# EAGLE board Prototype1 (EAGLE 6.1)
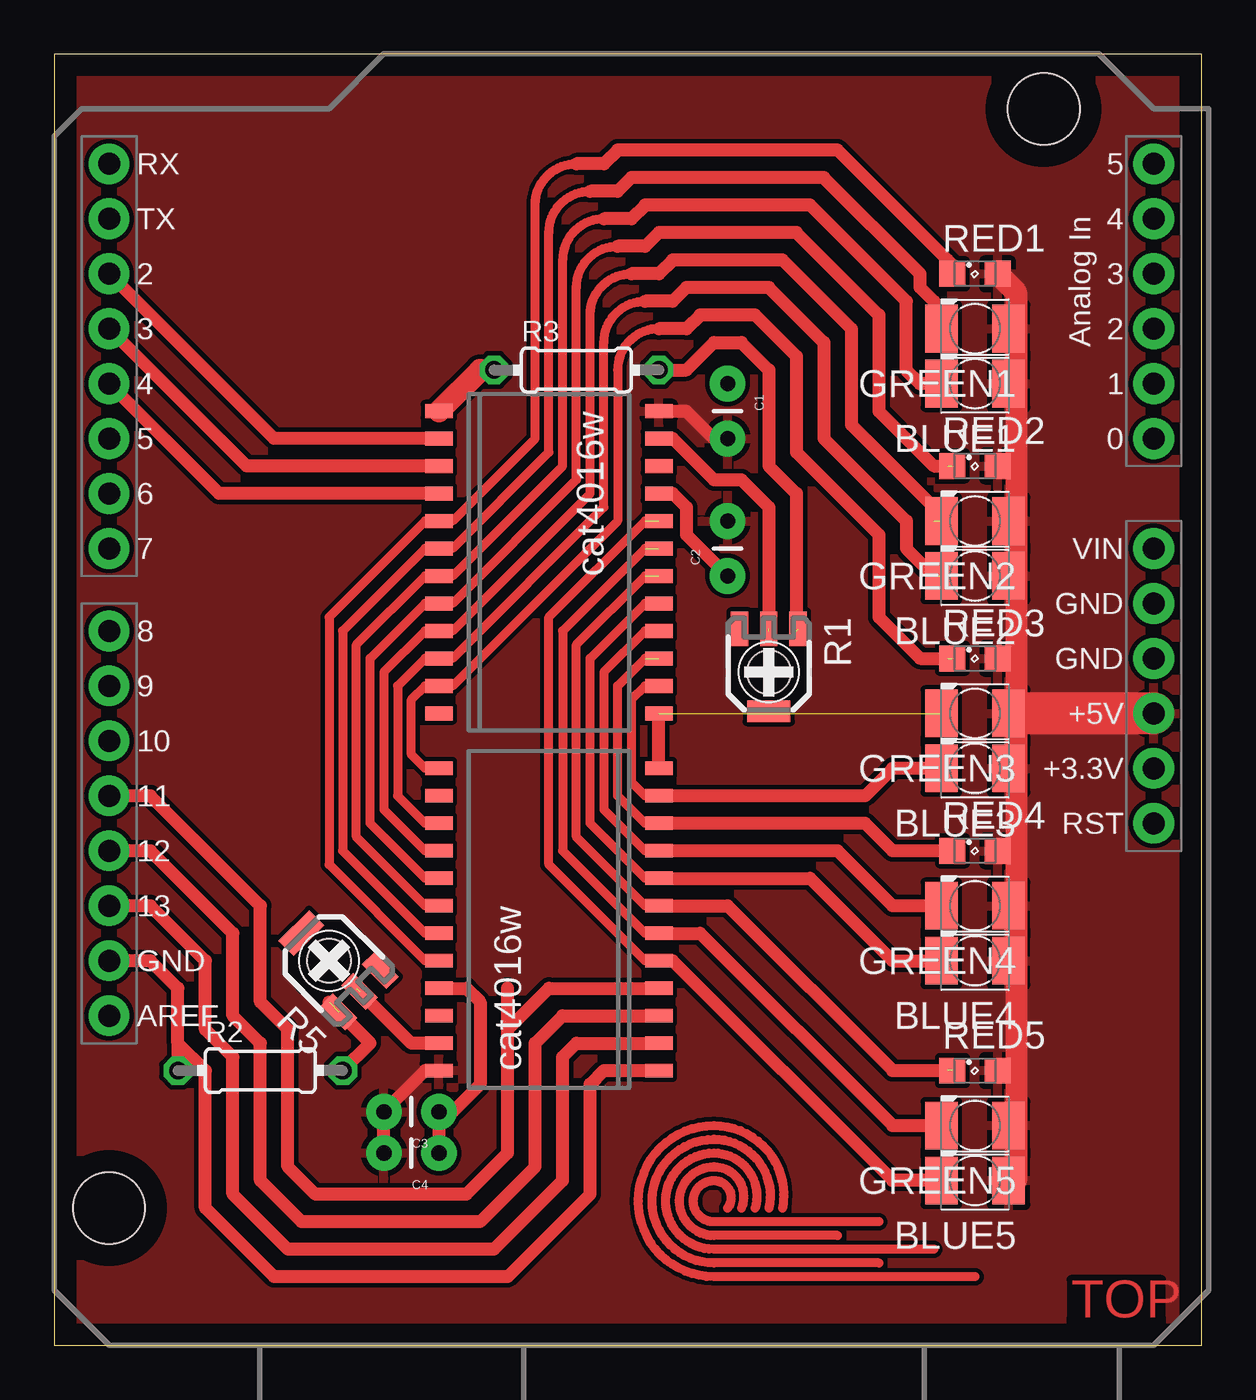
[diagram p0: board, top side]
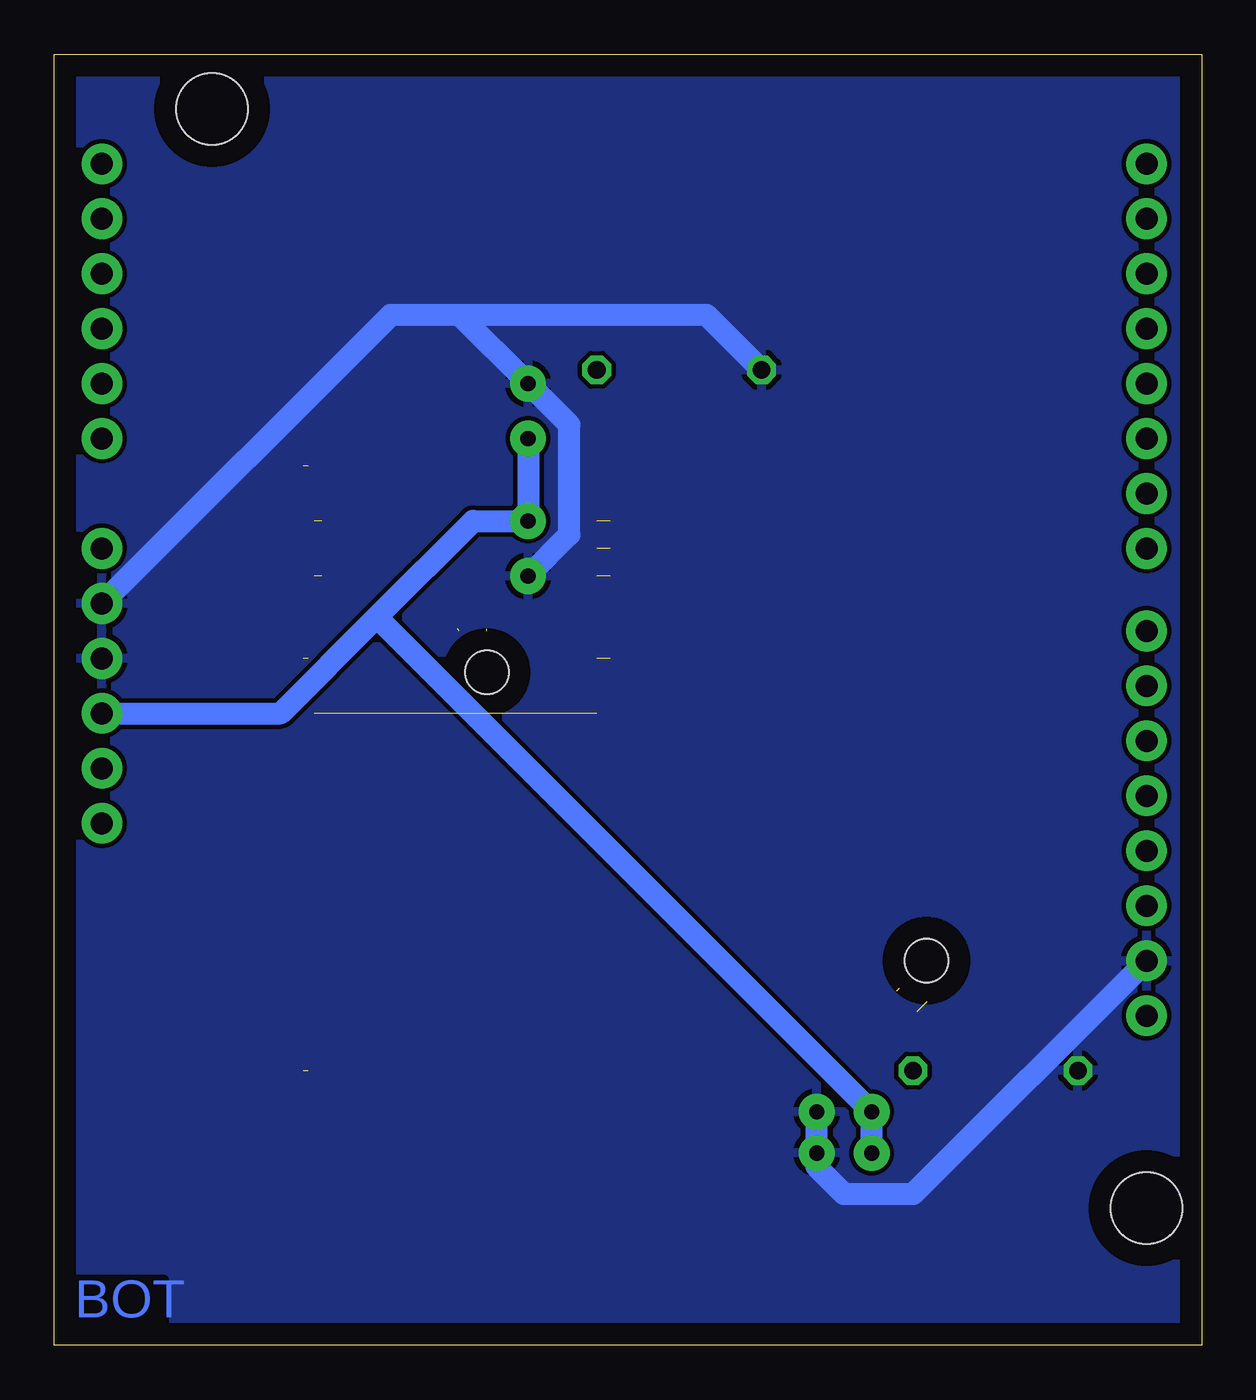
[diagram p1: board, bottom side, seen from below]

Size 53.01 x 59.68 mm. Coordinates in mm from the lower left corner, seen from the top.
Outline: 0,0 53.01,0 53.01,59.68 0,59.68 0,0
Copper layers (1*16): Top 0.035mm / dielectric 1.5mm / Bottom 0.035mm
Design rules: minimum track width 10mil, minimum drill 24mil, track to track 8mil, track to pad 8mil, pad to pad 8mil, via to via 8mil, smd to smd 8mil, copper to edge 40mil, drill to drill 8mil, minimum pad ring 10mil, minimum via ring 8mil, stop-mask expansion 4mil, vias tented up to drill 0mil, thermal gap 10mil

## Footprints (pad centres in the part's own frame; a part is rotated, then mirrored left to right if it is on the bottom)
KA-3528ASYC = smd 1.5 x 2.2: A -1.55,0; C 1.55,0
CAP-PTH-SMALL = drill 0.7 pad 1.651: 1 0,0; 2 2.54,0
RTRIM3165W = smd 0.8 x 1.6: 1 -1.35,-2; 2 0,-2; 3 1.35,-2 | smd 2 x 1: 4 0,1.8 | hole 2: 0,0
0204/7 = drill 0.813 octagon: 1 -3.81,0; 2 3.81,0
SML0805 = smd 1.2 x 1.2: A 1.05,0; C -1.05,0
DUEMILANOVE_SHIELD = drill 1.016 pad 1.88: 3.3V 50.8,26.67; 5V 50.8,29.21; A0 50.8,41.91; A1 50.8,44.45; A2 50.8,46.99; A3 50.8,49.53; A4 50.8,52.07; A5 50.8,54.61; AREF 2.54,15.24; D2 2.54,49.53; D3 2.54,46.99; D4 2.54,44.45; D5 2.54,41.91; D6 2.54,39.37; D7 2.54,36.83; D8 2.54,33.02; D9 2.54,30.48; D10 2.54,27.94; D11 2.54,25.4; D12 2.54,22.86; D13 2.54,20.32; GND@0 50.8,31.75; GND@1 50.8,34.29; GND@2 2.54,17.78; RES 50.8,24.13; RX 2.54,54.61; TX 2.54,52.07; VIN 50.8,36.83 | hole 3.302: 45.72,57.15; 2.54,6.35
SOIC24W = smd 0.635 x 1.27: 1 -6.985,-5.08; 2 -5.715,-5.08; 3 -4.445,-5.08; 4 -3.175,-5.08; 5 -1.905,-5.08; 6 -0.635,-5.08; 7 0.635,-5.08; 8 1.905,-5.08; 9 3.175,-5.08; 10 4.445,-5.08; 11 5.715,-5.08; 12 6.985,-5.08; 13 6.985,5.08; 14 5.715,5.08; 15 4.445,5.08; 16 3.175,5.08; 17 1.905,5.08; 18 0.635,5.08; 19 -0.635,5.08; 20 -1.905,5.08; 21 -3.175,5.08; 22 -4.445,5.08; 23 -5.715,5.08; 24 -6.985,5.08

## Placement (x,y rotation side)
BLUE1  [KA-3528ASYC]  42.55,44.45 180 top
BLUE2  [KA-3528ASYC]  42.55,35.56 180 top
BLUE3  [KA-3528ASYC]  42.55,26.67 180 top
BLUE4  [KA-3528ASYC]  42.55,17.78 180 top
BLUE5  [KA-3528ASYC]  42.55,7.62 180 top
C1  500nF  [CAP-PTH-SMALL]  31.11,44.45 270 top
C2  500nF  [CAP-PTH-SMALL]  31.11,35.56 90 top
C3  500nF  [CAP-PTH-SMALL]  17.78,10.79 180 top
C4  500nF  [CAP-PTH-SMALL]  17.78,8.89 180 top
GREEN1  [KA-3528ASYC]  42.55,46.99 180 top
GREEN2  [KA-3528ASYC]  42.55,38.1 180 top
GREEN3  [KA-3528ASYC]  42.55,29.21 180 top
GREEN4  [KA-3528ASYC]  42.55,20.32 180 top
GREEN5  [KA-3528ASYC]  42.55,10.16 180 top
R1  [RTRIM3165W]  33.02,31.11 180 top
R2  [0204/7]  9.53,12.7 0 top
R3  [0204/7]  24.13,45.09 0 top
R5  [RTRIM3165W]  12.7,17.78 45 top
RED1  [SML0805]  42.55,49.53 0 top
RED2  [SML0805]  42.55,40.64 0 top
RED3  [SML0805]  42.55,31.75 0 top
RED4  [SML0805]  42.55,22.86 0 top
RED5  [SML0805]  42.55,12.7 0 top
U1  ARDUINO_SHIELDLABEL  [DUEMILANOVE_SHIELD]  0,0 0 top
U$2  CAT4016  [SOIC24W]  22.86,36.2 270 top
U$3  CAT4016  [SOIC24W]  22.86,19.68 90 top

## Library data of the parts
BLUE1-BLUE5 GREEN1-GREEN5 RED1-RED5 = led
C1-C4 U1 = SparkFun
R1-R3 R5 = rcl
U$2 U$3 = CAT4016

## Nets
+5V: BLUE1.A BLUE2.A BLUE3.A BLUE4.A BLUE5.A C1.2 C2.2 C3.2 C4.2 GREEN1.A GREEN2.A GREEN3.A GREEN4.A GREEN5.A RED1.A RED2.A RED3.A RED4.A RED5.A U1.5V U$2.24 U$3.24
GND: C1.1 C2.1 C3.1 C4.1 R2.1 R3.1 U1.GND@0 U1.GND@1 U1.GND@2 U$2.1 U$2.21 U$3.1 U$3.21
N$2: R1.1 R3.2
N$3: R2.2 R5.1
N$4: R1.2 U$2.23
N$5: R5.2 U$3.23
N$7: U1.D3 U$2.3
N$8: U1.D4 U$2.4
N$9: U1.D13 U$3.2
N$10: U1.D2 U$2.2
N$11: GREEN2.C U$2.9 U$3.16
N$12: RED2.C U$2.8 U$3.17
N$13: BLUE1.C U$2.7 U$3.18
N$14: GREEN1.C U$2.6 U$3.19
N$15: BLUE2.C U$2.10 U$3.15
N$16: RED1.C U$2.5 U$3.20
N$17: RED3.C U$2.11 U$3.13
N$18: GREEN3.C U$2.13 U$3.12
N$19: BLUE3.C U$2.14 U$3.11
N$20: RED4.C U$2.15 U$3.10
N$21: GREEN4.C U$2.16 U$3.9
N$22: BLUE4.C U$2.17 U$3.8
N$23: RED5.C U$2.18 U$3.7
N$24: GREEN5.C U$2.19 U$3.6
N$25: U1.D12 U$3.3
N$31: U1.D11 U$3.4
N$39: BLUE5.C U$2.20 U$3.5

## Tracks (layer width: path | path; a pad name or v marks a point on that pad's centre or on a via)
+5V
  Top 0.61: 44.45,10.16 GREEN5.A 43.81,10.16 | U$2.24 29.21,43.18 30.48,41.91 C1.2 | C4.2 C3.2 17.14,12.7 U$3.24
  Top 1.016: RED1.A 44.45,48.67 44.45,29.21 44.45,7.62
  Top 1.93: U1.5V 44.45,29.21
  Bottom 1.016: U1.5V 42.55,29.21 38.1,33.66 | C4.2 C3.2 38.1,33.66 | C1.2 C2.2 33.66,38.1 38.1,33.66
  pour Top: 0,0 53.34,0 53.34,59.69 0,59.69
GND
  Top 0.61: 5.71,13.97 6.99,12.7 6.99,6.35 10.16,3.17 20.95,3.17 24.77,6.99 24.77,12.06 25.4,12.7 U$3.1 | 5.71,13.97 5.71,16.51 4.45,17.78 U1.GND@2 | 5.71,13.97 R2.1 | U$3.21 19.05,16.51 19.68,15.88 19.68,12.06 18.41,10.79 C3.1 C4.1 | U$2.21 28.57,39.37 29.21,38.73 29.21,37.47 C2.1
  Top 1.016: U$2.1 19.68,45.09 R3.1
  Bottom 0.61: 37.47,47.62 34.29,47.62 22.86,47.62
  Bottom 1.016: 34.29,47.62 C1.1 29.21,42.55 29.21,37.47 C2.1 | R3.1 22.86,47.62 37.47,47.62 U1.GND@1 | U1.GND@2 13.34,6.99 16.51,6.99 17.78,8.26 C3.1
  pour Bottom: 0,59.69 53.34,59.69 53.34,0 0,0
N$2  (1 unrouted)
  Top 0.61: R3.2 29.21,45.09 30.48,46.35 31.75,46.35 33.02,45.09 33.02,40.64 34.29,39.37 34.29,33.02
N$3  (1 unrouted)
  Top 0.61: R2.2 14.61,13.97 12.7,15.88
N$4  (1 unrouted)
  Top 0.61: U$2.23 28.57,41.91 30.48,40.01 31.75,40.01 33.02,38.73 33.02,33.02
N$5  (1 unrouted)
  Top 0.61: U$3.23 16.51,13.97 13.97,16.51
N$7
  Top 0.61: U$2.3 8.89,40.64 U1.D3
N$8
  Top 0.61: U$2.4 7.62,39.37 U1.D4
N$9
  Top 0.61: U1.D13 4.45,20.32 6.99,17.78 6.99,14.61 8.26,13.34 8.26,6.99 10.79,4.45 20.32,4.45 23.5,7.62 23.5,13.34 24.13,13.97 U$3.2
N$10
  Top 0.61: U$2.2 10.16,41.91 U1.D2
N$11  (1 unrouted)
  Top 0.406: U$3.16 17.14,22.86 15.24,24.77 15.24,31.11 17.14,33.02 U$2.9 18.41,33.02 24.77,39.37 24.77,47.62 arc-90 26.67,49.53
  Top 0.61: 26.67,49.53 27.94,49.53 28.57,50.16 33.66,50.16 36.83,46.99 36.83,42.55 40.64,38.73 40.64,38.1
N$12  (1 unrouted)
  Top 0.406: U$3.17 17.14,21.59 14.61,24.13 14.61,31.75 17.14,34.29 U$2.8 18.41,34.29 24.13,40.01 24.13,48.9 arc-90 26.04,50.8
  Top 0.61: 26.04,50.8 27.3,50.8 27.94,51.44 34.29,51.44 38.1,47.62 38.1,43.18 40.64,40.64 41.27,40.64
N$13
  Top 0.406: U$3.18 17.14,20.32 13.97,23.5 13.97,32.38 17.14,35.56 U$2.7 18.41,35.56 23.5,40.64 23.5,50.16 arc-90 25.4,52.07
  Top 0.61: BLUE1.C 40.01,44.45 39.37,45.09 39.37,48.26 34.92,52.7 27.3,52.7 26.67,52.07 25.4,52.07
N$14
  Top 0.406: U$3.19 17.14,19.05 13.34,22.86 13.34,33.02 17.14,36.83 U$2.6 18.41,36.83 22.86,41.27 22.86,51.44 arc-90 24.77,53.34 | 40.64,48.26 40.64,46.99
  Top 0.61: GREEN1.C 40.99,47.91 40.64,48.26 40.01,48.9 40.01,49.53 35.56,53.98 26.67,53.98 26.04,53.34 24.77,53.34
N$15  (1 unrouted)
  Top 0.406: U$3.15 17.14,24.13 15.88,25.4 15.88,30.48 17.14,31.75 U$2.10 18.41,31.75 25.4,38.73 25.4,46.35 arc-90 27.3,48.26
  Top 0.61: 27.3,48.26 28.57,48.26 29.21,48.9 33.02,48.9 35.56,46.35 35.56,41.91 39.37,38.1 39.37,36.83 40.64,35.56
N$16
  Top 0.406: U$3.20 17.14,17.78 12.7,22.23 12.7,33.66 17.14,38.1 U$2.5 18.41,38.1 22.23,41.91 22.23,52.7 arc-90 24.13,54.61 | 41.27,50.16 41.27,49.53
  Top 0.61: RED1.C 41.49,49.95 41.27,50.16 36.2,55.24 26.04,55.24 25.4,54.61 24.13,54.61
N$17  (1 unrouted)
  Top 0.406: U$3.13 17.14,26.67 16.51,27.3 16.51,29.84 17.14,30.48 U$2.11 18.41,30.48 26.04,38.1 26.04,45.09 arc-90 27.94,46.99
  Top 0.61: 27.94,46.99 29.21,46.99 29.84,47.62 32.38,47.62 34.29,45.72 34.29,41.27 38.1,37.47 38.1,33.66 40.01,31.75 41.27,31.75
N$18  (1 unrouted)
  Top 0.61: U$3.12 U$2.13
N$19
  Top 0.305: 27.3,25.4 U$3.11
  Top 0.406: 27.3,25.4 26.67,26.04 26.67,29.84 27.3,30.48 U$2.14
  Top 0.61: BLUE3.C 38.73,26.67 37.47,25.4 U$3.11
N$20  (1 unrouted)
  Top 0.406: U$3.10 27.3,24.13 26.04,25.4 26.04,30.48 27.3,31.75
  Top 0.61: RED4.C 38.73,22.86 37.47,24.13 U$3.10
N$21
  Top 0.406: U$2.16 27.3,33.02 25.4,31.11 25.4,24.77 27.3,22.86 U$3.9
  Top 0.61: GREEN4.C 38.73,20.32 36.2,22.86 U$3.9
N$22
  Top 0.406: U$3.8 27.3,21.59 24.77,24.13 24.77,31.75 27.3,34.29 U$2.17
  Top 0.61: U$3.8 34.92,21.59 38.73,17.78 BLUE4.C
N$23  (2 unrouted)
  Top 0.305: U$3.7 27.3,20.32
  Top 0.406: 27.3,20.32 24.13,23.5 24.13,32.38 27.3,35.56
  Top 0.61: U$3.7 31.11,20.32 38.73,12.7 41.27,12.7
N$24  (1 unrouted)
  Top 0.305: 27.3,19.05 U$3.6
  Top 0.406: 27.3,36.83 23.5,33.02 23.5,22.86 27.3,19.05
  Top 0.61: U$3.6 29.84,19.05 38.73,10.16 GREEN5.C
N$25
  Top 0.61: U1.D12 4.45,22.86 8.26,19.05 8.26,15.24 9.53,13.97 9.53,7.62 11.43,5.71 19.68,5.71 22.23,8.26 22.23,13.97 23.5,15.24 U$3.3
N$29
  Top 0.406: 17.14,20.32 13.97,23.5 13.97,32.38 17.14,35.56
N$30
  Top 0.406: 17.14,36.83 13.34,33.02 13.34,22.86 17.14,19.05
N$31
  Top 0.61: U1.D11 4.45,25.4 9.53,20.32 9.53,15.88 10.79,14.61 10.79,8.26 12.06,6.99 19.05,6.99 20.95,8.89 20.95,14.61 | 20.95,14.61 22.86,16.51 U$3.4 | 20.95,14.61 20.95,16.51
N$35
  Top 0.406: 38.1,5.71 30.48,5.71 arc-180 30.48,7.62 arc-127 31.11,6.35
N$38
  Top 0.406: 36.2,5.08 30.48,5.08 arc-180 30.48,8.26 arc-113 31.75,6.35
N$39  (1 unrouted)
  Top 0.305: U$3.5 27.3,17.78
  Top 0.406: 27.3,17.78 22.86,22.23 22.86,33.66 27.3,38.1
  Top 0.61: BLUE5.C 38.73,7.62 28.57,17.78 U$3.5
N$40
  Top 0.406: 40.64,4.45 30.48,4.45 arc-180 30.48,8.89 arc-106 32.38,6.35
N$41
  Top 0.406: 38.1,3.81 30.48,3.81 arc-180 30.48,9.53 arc-103 33.02,6.35
N$42
  Top 0.406: 42.55,3.17 30.48,3.17 arc-180 30.48,10.16 arc-100 33.66,6.35

## Text on the board
Top: TOP
Bottom: BOT